# Altium PCB Amber_Main_Board.PcbDoc (part 5 of 6)
Units mm, origin at the board's own origin, x right, y up, seen from the top; angles counter-clockwise.
Board outline 90 x 23 mm, 4 copper layers (Top Layer, Power, Ground, Bottom Layer), stack 1.142 mm thick; 237 components, 104 nets, 614 pads, 347 vias.
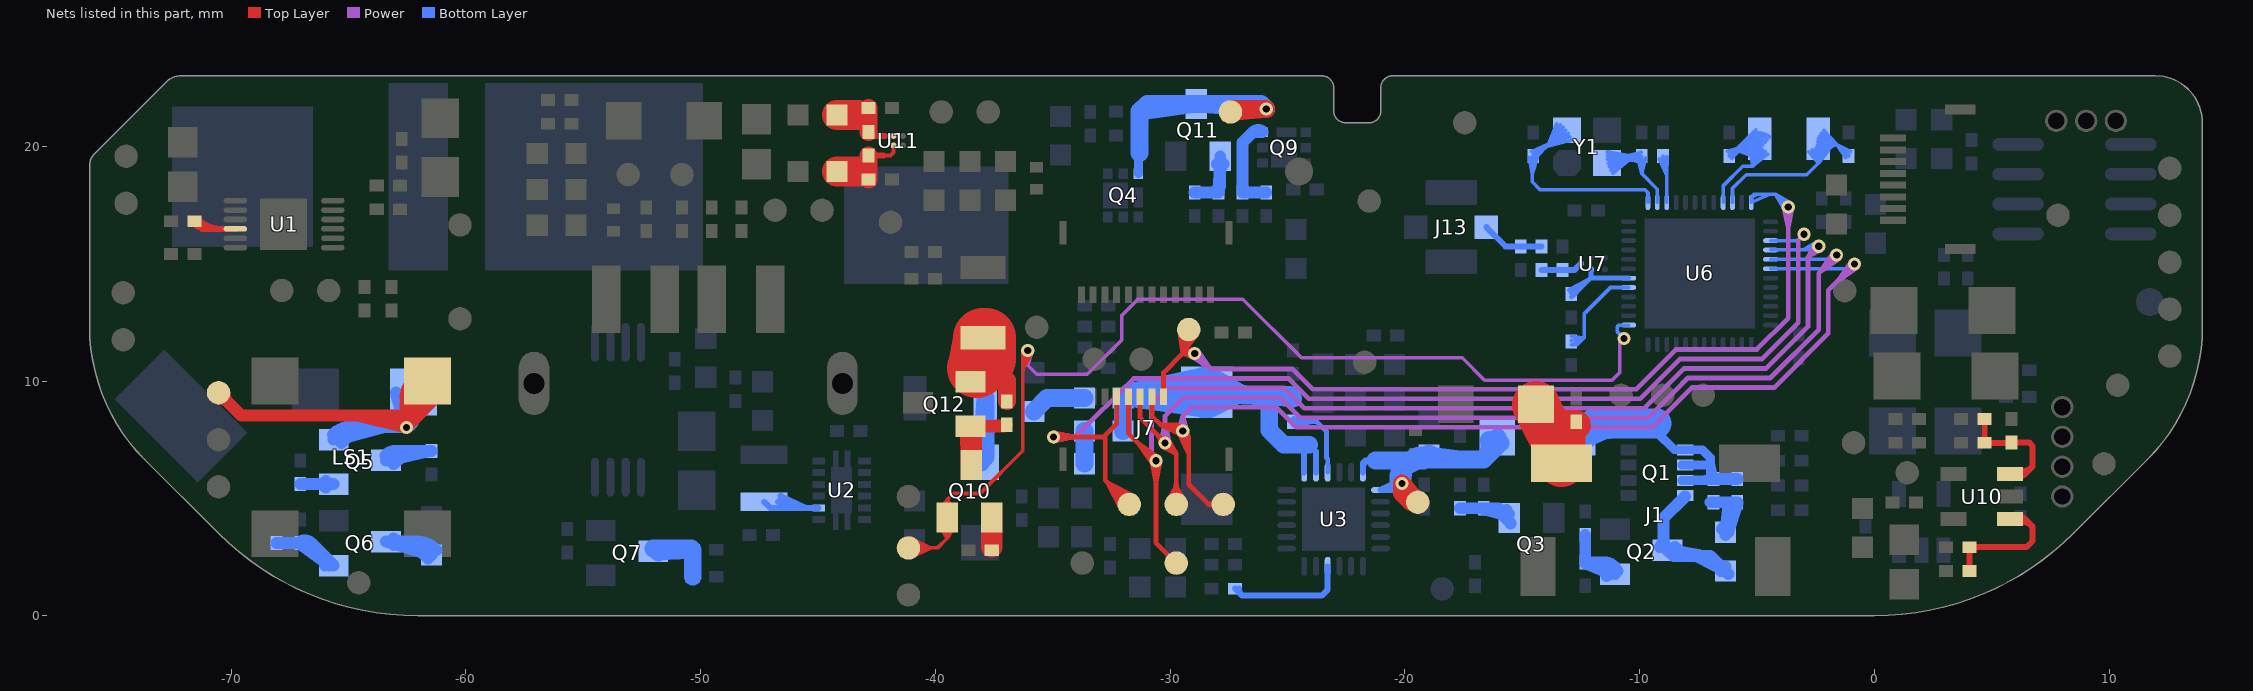
[diagram p7: the nets of this part, all layers, seen from the top]

## Via types
v1: diameter 0.559, hole 0.305, Top Layer to Bottom Layer, tented both sides, 306 vias
v2: diameter 0.66, hole 0.33, Top Layer to Bottom Layer, tented both sides, 16 vias
v3: diameter 0.762, hole 0.508, Top Layer to Bottom Layer, tented both sides, 12 vias
v4: diameter 0.6, hole 0.3, Top Layer to Bottom Layer, tented both sides, 9 vias
v5: diameter 0.5, hole 0.3, Top Layer to Bottom Layer, 3 vias
v6: diameter 0.762, hole 0.559, Top Layer to Bottom Layer, tented both sides, 1 vias

## Nets (pads, with @x,y where several pads share a name; then routed paths per layer and width w, separated by ;. In a path a pad name is that pad's centre, name@x,y a point inside that pad or via, vN(x,y) a via of type N, cw(c..) or ccw(c..) an arc to the next point about the centre after c; other vN are vias at no path point) (continued)
NetC14_1: C14.1 C19.1 L7.2 TP24.1 U3.1 U3.24 | length 48.1
  Top Layer w0.762: -20.03,5.295 v1(-20.12,5.633) ; TP24.1@-19.457,4.958 cw(c-19.486,5.853) -20.12,5.22 ; TP24.1@-19.452,4.958 cw(c-19.445,5.633) v1(-20.12,5.633) ; -20.12,5.22 v1(-20.12,5.633) ; -20.12,5.22 v1(-20.12,5.633) ; -20.12,5.22 v1(-20.12,5.633) ; -20.12,5.22 v1(-20.12,5.633) ; -20.12,5.22 TP24.1@-19.453,4.839 ; -20.12,5.22 TP24.1@-19.453,4.839 ; -20.12,5.22 TP24.1@-19.739,4.839 ; -20.12,5.22 v1(-20.12,5.633) ; v1(-20.12,5.633) TP24.1@-19.739,4.839 ; v1(-20.12,5.633) TP24.1@-19.453,4.839 ; v1(-20.12,5.633) TP24.1@-19.453,4.839 ; v1(-20.12,5.633) TP24.1@-19.453,4.839 ; TP24.1@-19.739,4.839 TP24.1@-19.453,4.839
  Bottom Layer w0.254: U3.24@-21.793,6.384 cw(c-21.514,6.384) -21.711,6.582 ; U3.24@-21.791,6.109 -21.791,6.502 -21.673,6.62 ; -21.756,6.524 -21.791,6.384 -21.673,6.62 ; -21.251,6.62 -21.673,6.62 ; -20.513,5.5 U3.1@-20.766,5.359 ; -20.492,5.359 ccw(c-20.492,5.949) v1@-20.043,5.567 ; v1@-20.236,5.731 cw(c-21.041,6.415) U3.1@-21.041,5.359 ; v1@-20.194,5.766 U3.1@-20.766,5.359 ; v1@-20.191,5.768 U3.1@-20.686,5.421 ; v1@-20.175,5.775 U3.1@-21.041,5.359 ; v1@-20.088,5.484 U3.1@-21.041,5.359 ; v1@-20.085,5.484 U3.1@-20.686,5.421 ; v1@-20.076,5.487 U3.1@-20.766,5.359 ; U3.1@-21.041,5.359 v1(-20.12,5.633) ; U3.1@-21.041,5.359 -20.394,5.359 ; U3.1@-20.766,5.359 -20.394,5.359 ; U3.1@-20.766,5.359 v1(-20.12,5.633) ; U3.1@-20.686,5.421 v1(-20.12,5.633) ; -20.394,5.359 v1(-20.12,5.633)
  Bottom Layer w0.762: -21.251,6.62 -19.768,6.62 ; v1@-20.222,5.633 cw(c-18.934,5.633) -19.844,6.543 ; v1@-20.208,5.581 cw(c-19.72,5.868) -20.12,6.268 ; -20.07,6.317 cw(c-18.977,5.224) C14.1@-18.977,6.77 ; -20.049,6.277 v1(-20.12,5.633) ; -19.75,6.563 C14.1@-18.977,6.839 ; C14.1@-19.003,6.775 ccw(c-19.268,6.119) -19.768,6.62 ; C14.1@-18.928,6.888 ccw(c-18.37,7.446) -18.37,6.657 ; L7.2@-16.426,7.49 cw(c-17.245,7.259) -16.643,6.657 ; L7.2@-15.934,7.366 -16.643,6.657 ; v1(-20.12,5.633) -20.12,6.268 ; v1(-20.12,5.633) -20.12,6.268 ; v1(-20.12,5.633) -20.12,6.268 ; -20.12,6.268 C14.1@-18.977,6.839 ; -20.12,6.268 -19.768,6.62 ; -19.768,6.62 C14.1@-18.977,6.839 ; -19.768,6.62 C14.1@-18.977,6.839 ; -19.768,6.62 C14.1@-18.977,6.839 ; -19.768,6.62 -19.197,6.62 C14.1@-19.16,6.657 ; -19.674,6.62 ccw(c-19.674,7.536) C14.1@-19.026,6.888 ; -19.674,6.62 ccw(c-19.674,7.536) C14.1@-19.026,6.888 ; -19.674,6.62 ccw(c-19.674,7.536) C14.1@-19.026,6.888 ; -19.437,6.651 C14.1@-18.977,6.839 ; -19.437,6.651 C14.1@-18.977,6.839 ; -19.437,6.651 C14.1@-18.977,6.839 ; C14.1@-19.16,6.657 C19.1@-17.653,6.657 ; C14.1@-19.16,6.657 C14.1@-18.977,6.839 ; C14.1@-18.977,6.839 C19.1@-17.653,6.657 ; C19.1@-17.653,6.657 -16.643,6.657 ; -16.643,6.657 -16.061,7.593 -16.643,6.657
NetC17_1: C17.1 L4.1 R75.1 R76.1 U3.19 U3.20 | length 60.1
  Bottom Layer w0.254: U3.19@-24.291,6.109 -24.291,7.069 ; U3.19@-24.291,6.384 -24.291,7.069 ; U3.20@-23.791,6.109 -23.791,6.998 ; U3.20@-23.791,6.384 -23.791,6.998 ; -24.291,7.069 -24.076,7.284 -23.791,6.998
  Bottom Layer w0.762: R76.1@-32.004,7.874 R75.1@-32.004,9.271 ; R75.1@-31.955,9.222 cw(c-31.251,8.518) -31.251,9.514 ; -31.509,9.48 R75.1@-32.004,9.271 ; L4.1@-29.179,9.514 R75.1@-32.004,9.271 ; L4.1@-28.956,9.006 ccw(c-30.184,7.778) -30.184,9.514 ccw(c-30.184,11.25) L4.1@-28.956,10.022 ; L4.1@-28.68,8.834 -29.735,9.573 ; L4.1@-28.68,10.194 -29.735,9.455 ; L4.1@-28.617,8.815 -29.735,9.455 ; L4.1@-28.617,10.213 -29.735,9.573 ; L4.1@-28.572,10.222 R75.1@-31.832,9.286 ; L4.1@-28.526,8.799 R75.1@-31.761,9.514 ; L4.1@-28.526,10.229 R75.1@-31.761,9.514 ; L4.1@-28.476,8.796 R75.1@-31.832,9.286 ; L4.1@-28.334,9.4 -24.902,9.4 C17.1@-24.765,9.263 L4.1@-27.358,9.4 ; L4.1@-28.317,8.807 -27.336,9.354 ; L4.1@-28.291,8.812 -26.987,9.472 ; L4.1@-28.251,10.206 -26.987,9.472 ; L4.1@-28.123,10.155 -27.336,9.354 ; L4.1@-27.94,9.006 cw(c-26.988,8.054) -26.988,9.4 ; L4.1@-27.94,10.022 ccw(c-26.436,11.526) -26.436,9.4 ; -25.781,9.017 -25.781,7.903 -25.162,7.284 -24.076,7.284 ; R75.1@-32.004,9.271 R75.1@-31.761,9.514 ; R75.1@-31.832,9.286 L4.1@-28.448,9.514 ; R75.1@-31.761,9.514 L4.1@-28.448,9.514 ; -29.735,9.455 L4.1@-28.448,9.514 ; -29.735,9.573 L4.1@-28.448,9.514 ; L4.1@-28.448,9.514 -27.336,9.354 ; L4.1@-28.448,9.514 -26.987,9.472
NetC17_2: C17.2 U3.21 | length 7.5
  Bottom Layer w0.203: C17.2@-24.752,8.115 -23.905,8.263 C17.2@-24.752,8.411 ; C17.2@-24.73,8.119 -24.499,8.251 ; C17.2@-24.73,8.407 -24.499,8.275 ; C17.2@-24.717,8.123 -24.499,8.275 ; C17.2@-24.717,8.403 -24.499,8.251 ; C17.2@-24.66,8.158 cw(c-24.407,7.905) -24.407,8.263 cw(c-24.407,8.621) C17.2@-24.66,8.368 ; U3.21@-23.291,6.109 -23.291,6.681 ; U3.21@-23.291,6.384 -23.291,6.681 ; C17.2@-24.765,8.263 -24.499,8.251 ; C17.2@-24.765,8.263 -24.499,8.275 ; C17.2@-24.765,8.263 -23.757,8.263 -23.346,7.852 -23.346,6.736 -23.291,6.681
NetC18_1: C18.1 L8.2 R12.1 | length 14.6
  Bottom Layer w0.508: C18.1@-6.985,4.834 C18.1@-6.858,4.834 ; L8.2@-6.489,3.695 ccw(c-7.13,4.336) -6.223,4.336 ; L8.2@-6.448,3.726 ccw(c-6.754,4.255) -6.163,4.097 ; L8.2@-6.35,3.429 L8.2@-6.223,3.556 ; -6.254,4.101 L8.2@-6.35,3.556 ; L8.2@-6.223,3.874 cw(c-4.932,3.874) R12.1@-5.845,4.787 ; -6.223,4.395 cw(c-5.83,4.395) R12.1@-5.842,4.788 ; -6.05,4.519 L8.2@-6.35,3.556 ; R12.1@-5.969,4.834 C18.1@-6.858,4.834 ; R12.1@-5.842,4.834 C18.1@-6.858,4.834 ; L8.2@-6.35,3.556 R12.1@-5.842,4.784 ; L8.2@-6.35,3.556 -6.223,4.707 ; L8.2@-6.35,3.556 R12.1@-5.842,4.784 ; L8.2@-6.35,3.556 -6.179,4.208 R12.1@-5.842,4.784 ; L8.2@-6.223,3.556 R12.1@-5.842,4.784 ; L8.2@-6.223,3.556 -6.223,4.707 ; -6.223,4.707 R12.1@-5.842,4.784
NetC18_2: C18.2 L7.1 Q1.1 Q1.2 Q1.3 R12.2 | length 21
  Bottom Layer w0.381: -9.271,8.187 -9.271,7.825 -8.517,7.071 Q1.1@-8.066,7.071 -7.325,7.071 ; Q1.3@-8.193,5.771 Q1.3@-8.066,5.771 ; Q1.2@-8.193,6.421 Q1.2@-8.066,6.421 -7.041,6.421 ; Q1.2@-7.951,6.421 -7.041,6.421 ; Q1.1@-7.951,7.071 -7.325,7.071 ; -6.985,6.334 ccw(c-6.408,6.334) C18.2@-6.816,5.926 ; -6.965,6.185 -6.858,5.884 -6.985,6.477 ; Q1.3@-8.066,5.771 C18.2@-6.858,5.834 -7.951,5.771 C18.2@-7.048,5.771 ; Q1.3@-8.066,5.771 C18.2@-7.048,5.771 ; -7.325,7.071 -6.985,6.731 -6.985,6.477 ; C18.2@-7.048,5.771 -6.985,5.834 -6.985,6.477 ; -7.041,6.421 -6.985,6.477
  Bottom Layer w0.508: C18.2@-6.985,5.834 C18.2@-6.858,5.834 ; R12.2@-5.969,5.834 C18.2@-6.858,5.834 ; R12.2@-5.842,5.834 C18.2@-6.858,5.834
  Bottom Layer w1.27: L7.1@-12.641,7.493 -11.947,8.187 -9.271,8.187 ; L7.1@-12.641,7.673 -11.631,8.117 ; L7.1@-12.553,7.584 cw(c-11.099,6.13) -11.099,8.187
NetC29_2: C29.2 U6.37 Y1.3 | length 37.8
  Bottom Layer w0.152: C29.2@-14.706,19.52 -14.583,18.819 ; C29.2@-14.704,19.503 -14.563,19.14 ; C29.2@-14.655,19.406 cw(c-14.829,19.232) -14.583,19.232 ; C29.2@-14.619,19.779 -13.908,20.087 ; C29.2@-14.605,19.787 -14.123,19.912 ; -14.583,18.987 cw(c-13.99,18.987) C29.2@-14.409,19.406 ; C29.2@-14.532,19.579 -14.583,19.528 -14.583,18.482 -14.256,18.155 -9.782,18.155 -9.647,18.02 ; C29.2@-14.532,19.65 ccw(c-14.532,20.1) -14.214,19.782 ; C29.2@-14.532,19.803 ccw(c-14.532,20.62) -13.954,20.042 ; C29.2@-14.435,19.561 Y1.3@-13.362,20.634 ; C29.2@-14.414,19.501 -13.908,20.087 ; C29.2@-14.41,19.505 -14.123,19.912 ; C29.2@-14.366,19.477 -14.563,19.14 ; C29.2@-14.362,19.495 -14.583,18.819 ; -14.238,19.758 cw(c-13.146,18.665) Y1.3@-13.146,20.21 ; -13.978,20.018 cw(c-13.146,19.186) Y1.3@-13.146,20.362 ; -13.838,20.158 ccw(c-14.363,20.684) Y1.3@-13.62,20.684 ; -13.718,20.278 cw(c-13.146,19.706) Y1.3@-13.146,20.515 ; Y1.3@-13.545,20.939 -13.734,20.205 ; Y1.3@-13.533,20.958 -13.918,20.003 ; Y1.3@-13.526,20.967 -13.719,20.312 ; Y1.3@-13.397,20.884 -13.734,20.205 ; Y1.3@-13.394,20.889 -13.918,20.003 ; Y1.3@-13.379,20.905 -13.719,20.312 ; Y1.3@-13.268,20.801 -13.918,20.003 ; Y1.3@-13.267,20.802 -13.734,20.205 ; Y1.3@-13.255,20.813 -13.719,20.312 ; Y1.3@-13.072,20.532 -13.719,20.312 ; Y1.3@-13.055,20.542 -13.734,20.205 ; Y1.3@-13.045,20.548 -13.918,20.003 ; Y1.3@-13.042,20.221 -13.719,20.312 ; Y1.3@-13.04,20.38 -13.719,20.312 ; Y1.3@-13.001,20.397 -13.734,20.205 ; Y1.3@-12.977,20.241 -13.734,20.205 ; Y1.3@-12.974,20.412 -13.918,20.003 ; Y1.3@-12.923,20.266 -13.918,20.003 ; U6.37@-9.647,17.608 -9.647,18.02 ; U6.37@-9.647,17.833 -9.647,18.02 ; -14.583,18.819 -14.532,19.529 -14.563,19.14 ; -14.123,19.912 -14.532,19.629 -13.908,20.087 ; -13.918,20.003 Y1.3@-13.146,20.684 ; -13.734,20.205 Y1.3@-13.146,20.684 ; -13.719,20.312 Y1.3@-13.146,20.684
NetC31_2: C31.2 U6.38 Y1.1 | length 37.4
  Bottom Layer w0.152: Y1.1@-11.385,19.603 -10.261,19.579 ; Y1.1@-11.378,19.45 -10.261,19.579 ; Y1.1@-11.371,19.757 -10.261,19.579 ; Y1.1@-11.37,19.451 -10.668,19.468 ; Y1.1@-11.361,19.452 -10.468,19.449 ; Y1.1@-11.357,19.605 -10.668,19.468 ; Y1.1@-11.348,19.605 -10.468,19.449 ; Y1.1@-11.332,19.275 cw(c-10.765,18.898) -10.765,19.579 ; Y1.1@-11.309,19.756 -10.668,19.468 ; Y1.1@-11.307,19.756 -10.468,19.449 ; Y1.1@-11.299,19.121 -10.468,19.449 ; Y1.1@-11.299,19.234 -10.954,19.579 C31.2@-9.913,19.579 ; Y1.1@-11.29,19.124 -10.261,19.579 ; Y1.1@-11.282,19.127 -10.668,19.468 ; Y1.1@-11.231,18.984 -10.468,19.449 ; Y1.1@-11.218,18.989 -10.261,19.579 ; Y1.1@-11.205,19.19 cw(c-10.481,18.71) -10.481,19.579 ; Y1.1@-11.193,19.001 -10.668,19.468 ; Y1.1@-11.138,18.858 -10.468,19.449 ; Y1.1@-11.128,18.863 -10.261,19.579 ; Y1.1@-11.078,19.106 cw(c-10.197,18.521) -10.197,19.579 ; Y1.1@-11.075,18.895 -10.668,19.468 ; Y1.1@-10.951,19.022 cw(c-9.913,18.333) C31.2@-9.913,19.579 ; C31.2@-10.085,19.507 -9.913,18.841 ; C31.2@-10.082,19.488 -9.927,19.218 ; C31.2@-10.078,19.473 -9.899,19.218 ; C31.2@-10.036,19.406 cw(c-10.333,19.109) -9.913,19.109 cw(c-9.493,19.109) C31.2@-9.79,19.406 ; C31.2@-10.036,19.456 ccw(c-10.333,19.159) -10.333,19.579 ccw(c-10.333,19.998) C31.2@-10.036,19.702 ; C31.2@-9.969,19.414 -10.224,19.593 ; C31.2@-9.969,19.743 -10.224,19.564 ; C31.2@-9.968,19.694 -10.536,19.412 ; C31.2@-9.954,19.41 -10.224,19.564 ; C31.2@-9.954,19.748 -10.224,19.593 ; C31.2@-9.934,19.406 -10.62,19.579 C31.2@-9.934,19.751 ; C31.2@-9.905,19.355 -10.536,19.412 ; C31.2@-9.749,19.473 -9.927,19.218 ; C31.2@-9.744,19.488 -9.899,19.218 ; C31.2@-9.741,19.507 -9.913,18.841 ; U6.38@-9.247,17.608 -9.247,18.175 ; U6.38@-9.247,17.833 -9.247,18.175 ; Y1.1@-11.346,19.284 -10.261,19.579 ; Y1.1@-11.346,19.284 -10.468,19.449 ; Y1.1@-11.346,19.284 -10.668,19.468 ; -10.536,19.412 C31.2@-9.913,19.529 ; -10.224,19.564 C31.2@-9.913,19.579 ; -10.224,19.593 C31.2@-9.913,19.579 ; -9.927,19.218 C31.2@-9.913,19.529 ; -9.913,18.841 C31.2@-9.913,19.529 ; -9.913,18.841 -9.247,18.175 ; -9.913,18.841 C31.2@-9.913,19.579 ; C31.2@-9.913,19.529 -9.899,19.218
NetC32_2: C32.2 U6.45 Y2.2 | length 49.1
  Bottom Layer w0.152: U6.45@-6.447,17.608 -6.447,18.31 ; U6.45@-6.447,17.833 -6.447,18.31 ; C32.2@-6.263,19.781 -5.91,19.875 ; C32.2@-6.256,19.785 -5.635,19.989 ; C32.2@-6.239,19.792 -5.745,19.878 ; C32.2@-6.207,19.8 -5.854,19.767 ; C32.2@-6.18,19.803 ccw(c-6.18,20.343) -5.798,19.961 ; C32.2@-6.075,19.49 -5.854,19.767 ; C32.2@-6.069,19.495 -5.745,19.878 ; C32.2@-6.067,19.692 cw(c-5.558,19.183) Y2.2@-5.073,19.714 ; C32.2@-6.066,19.498 -5.635,19.989 ; C32.2@-6.036,19.532 -5.91,19.875 ; C32.2@-6.006,19.629 cw(c-5.707,19.629) -5.919,19.84 ; C32.2@-5.954,19.804 cw(c-5.451,19.301) Y2.2@-4.97,19.827 ; -5.842,19.917 cw(c-5.343,19.418) Y2.2@-4.868,19.939 ; -5.729,20.03 cw(c-5.235,19.536) Y2.2@-4.765,20.052 ; -5.616,20.143 cw(c-5.128,19.654) Y2.2@-4.662,20.165 ; -5.503,20.256 cw(c-5.02,19.772) Y2.2@-4.559,20.277 ; -5.39,20.368 cw(c-4.912,19.89) Y2.2@-4.457,20.39 ; Y2.2@-5.312,19.959 -5.184,19.146 ; Y2.2@-5.299,20.204 ccw(c-5.444,20.165) -5.444,20.315 ; Y2.2@-5.299,20.426 cw(c-5.444,20.465) -5.444,20.315 ; Y2.2@-5.176,19.602 ccw(c-5.666,19.065) C32.2@-6.18,19.579 -5.444,20.315 ; Y2.2@-5.156,19.969 -5.184,19.146 ; Y2.2@-5.116,20.273 -5.51,19.775 ; Y2.2@-5.086,20.29 -5.404,19.886 ; Y2.2@-5.042,19.519 -5.404,19.886 ; Y2.2@-5.007,20.322 -5.918,19.841 ; Y2.2@-5.005,20.161 -5.51,19.775 ; Y2.2@-5.004,19.949 -5.184,19.146 ; Y2.2@-4.976,20.172 -5.404,19.886 ; Y2.2@-4.947,19.495 -5.918,19.841 ; Y2.2@-4.947,19.649 -5.404,19.886 ; Y2.2@-4.945,20.18 -5.918,19.841 ; Y2.2@-4.94,19.494 -5.51,19.775 ; Y2.2@-4.927,20.028 -5.51,19.775 ; Y2.2@-4.91,20.032 -5.404,19.886 ; Y2.2@-4.906,19.644 -5.918,19.841 ; Y2.2@-4.905,20.033 -5.918,19.841 ; Y2.2@-4.897,19.796 -5.404,19.886 ; Y2.2@-4.888,19.643 -5.51,19.775 ; Y2.2@-4.888,19.796 -5.918,19.841 ; Y2.2@-4.875,19.797 -5.51,19.775 ; Y2.2@-4.782,19.864 -5.184,19.146 ; Y2.2@-4.656,19.777 -5.184,19.146 ; Y2.2@-4.547,19.666 -5.184,19.146 ; -6.447,18.31 -5.61,19.146 -5.184,19.146 ; C32.2@-6.18,19.629 -5.91,19.875 ; C32.2@-6.18,19.629 -5.854,19.767 ; C32.2@-6.18,19.629 -5.635,19.989 ; C32.2@-6.18,19.629 -5.745,19.878 ; -5.918,19.841 Y2.2@-4.89,19.915 ; -5.51,19.775 Y2.2@-4.89,19.915 ; -5.444,20.315 -5.052,20.706 -5.444,20.315 ; -5.444,20.315 -4.957,20.578 -5.444,20.315 ; -5.444,20.315 -4.903,20.433 -5.444,20.315 ; -5.444,20.315 Y2.2@-4.89,20.315 ; -5.444,20.315 -5.052,19.923 -5.444,20.315 ; -5.444,20.315 -4.957,20.052 -5.444,20.315 ; -5.444,20.315 -4.903,20.196 -5.444,20.315 ; -5.444,20.315 Y2.2@-4.89,20.315 ; -5.404,19.886 Y2.2@-4.89,19.915 ; -5.184,19.146 Y2.2@-4.89,19.915 ; -5.184,19.146 -4.89,19.441 Y2.2@-4.89,20.315
NetC34_2: C34.2 U6.46 Y2.1 | length 31.4
  Bottom Layer w0.152: U6.46@-6.047,17.608 -6.047,18.207 ; U6.46@-6.047,17.833 -6.047,18.207 ; Y2.1@-2.79,19.774 -2.39,19.279 ; Y2.1@-2.655,19.857 -2.39,19.279 ; Y2.1@-2.553,19.524 cw(c-2.655,19.279) -2.39,19.279 ; Y2.1@-2.509,19.904 -2.39,19.279 ; Y2.1@-2.429,20.046 -1.582,20.061 ; Y2.1@-2.418,20.199 -1.582,20.061 ; Y2.1@-2.413,20.032 -1.855,20.079 ; Y2.1@-2.412,19.891 -1.582,20.061 ; Y2.1@-2.404,20.186 -1.855,20.079 ; Y2.1@-2.386,20.034 -1.863,19.957 ; Y2.1@-2.367,19.798 -1.863,19.957 ; Y2.1@-2.351,20.337 -1.855,20.079 ; Y2.1@-2.346,20.425 -1.582,20.061 ; Y2.1@-2.343,19.805 -1.855,20.079 ; Y2.1@-2.342,20.182 -1.863,19.957 ; Y2.1@-2.299,19.659 -1.863,19.957 ; Y2.1@-2.272,19.904 -2.39,19.279 ; Y2.1@-2.268,20.557 -1.582,20.061 ; Y2.1@-2.252,20.315 -1.863,19.957 ; Y2.1@-2.25,19.682 -1.855,20.079 ; Y2.1@-2.227,19.524 ccw(c-2.125,19.279) -2.39,19.279 ; Y2.1@-2.189,19.541 -1.863,19.957 ; Y2.1@-2.166,20.674 -1.582,20.061 ; Y2.1@-2.134,19.824 cw(c-1.798,19.704) -1.798,20.061 ; Y2.1@-2.125,19.857 -2.39,19.279 ; Y2.1@-2.122,19.587 -1.855,20.079 ; Y2.1@-2.09,20.214 ccw(c-1.719,20.585) -1.719,20.061 ; Y2.1@-1.991,19.772 cw(c-1.582,19.627) -1.582,20.061 ; Y2.1@-1.99,19.774 -2.39,19.279 ; -1.482,19.961 ccw(c-1.1,20.343) C34.2@-1.1,19.803 ; -1.361,19.84 cw(c-1.573,19.629) C34.2@-1.274,19.629 ; C34.2@-1.244,19.532 -1.37,19.875 ; C34.2@-1.232,19.516 -1.582,20.061 ; C34.2@-1.1,19.579 -1.582,20.061 ; C34.2@-1.017,19.781 -1.37,19.875 ; C34.2@-1.002,19.773 -1.582,20.061 ; -6.047,18.207 -5.463,18.791 -2.878,18.791 -2.39,19.279 ; -2.39,19.279 Y2.1@-2.39,19.915 ; -2.39,19.279 Y2.1@-2.39,20.315 ; Y2.1@-2.39,19.915 -1.863,19.957 ; Y2.1@-2.39,19.915 -1.855,20.079 ; Y2.1@-2.39,20.315 -1.582,20.061 ; Y2.1@-2.39,20.315 -2.136,20.061 -1.582,20.061 ; -1.582,20.061 -1.1,19.629 -1.37,19.875
NetC35_2: C35.2 U6.39 | length 8.8
  Bottom Layer w0.152: C35.2@-9.171,19.474 -8.847,18.767 ; C35.2@-9.168,19.465 -8.88,18.974 ; C35.2@-9.135,19.412 -8.867,19.247 ; C35.2@-9.129,19.406 cw(c-9.81,18.725) -8.847,18.725 ; C35.2@-9.021,19.514 cw(c-9.442,19.093) -8.847,19.093 ; C35.2@-9.006,19.579 -8.847,19.42 U6.39@-8.847,17.608 ; U6.39@-8.847,17.833 -8.847,18.39 ; C35.2@-8.835,19.559 -8.867,19.247 ; C35.2@-8.833,19.541 -8.88,18.974 ; C35.2@-8.833,19.545 -8.847,18.767 ; C35.2@-9.006,19.529 -8.867,19.247 ; C35.2@-9.006,19.529 -8.847,18.767 ; C35.2@-9.006,19.529 -8.88,18.974
NetC39_1: C39.1 R41.2 U7.5 | length 1.8
  Bottom Layer w0.254: R41.2@-14.181,14.735 C39.1@-13.292,14.735 -12.773,14.735 U7.5@-12.509,14.999
NetC40_1: C40.1 J13.1 R41.1 | length 2.7
  Bottom Layer w0.254: J13.1@-16.534,16.555 -15.714,15.735 C40.1@-15.07,15.735 R41.1@-14.181,15.735
NetC41_2: C41.2 U6.30 U7.3 | length 8.2
  Bottom Layer w0.203: C41.2@-12.991,13.878 -12.183,14.304 ; C41.2@-12.971,13.889 -12.518,14.006 ; C41.2@-12.911,13.576 -12.104,14.383 U6.30@-10.472,14.383 ; C41.2@-12.911,13.901 ccw(c-12.911,14.687) -12.356,14.131 ; -12.518,14.006 -12.812,13.642 -12.183,14.304 ; -12.518,14.006 -12.911,13.753 -12.183,14.304 ; -12.076,14.411 U7.3@-12.076,14.749 -12.076,14.411
NetC42_2: C42.2 U6.29 | length 6.2
  Bottom Layer w0.152: C42.2@-12.919,11.9 -12.37,11.839 ; C42.2@-12.911,11.544 -12.665,11.544 -12.37,11.839 ; C42.2@-12.911,11.726 -12.37,11.839 ; C42.2@-12.849,11.564 -12.37,11.839 ; U6.29@-10.697,13.983 -11.242,13.983 ; U6.29@-10.472,13.983 -11.242,13.983 ; -12.37,11.839 -12.37,12.855 -11.242,13.983
NetC48_2: C48.2 C49.1 R49.2 U11.A2 | length 7.7
  Top Layer w0.178: -42.164,20.447 -42.155,20.438 U11.A2@-41.783,20.438
  Top Layer w0.254: C49.1@-42.853,20.611 -42.68,20.438 -42.155,20.438 -42.853,20.561 -42.445,20.462 ; C49.1@-42.766,20.648 ccw(c-42.259,21.155) -42.259,20.438
  Top Layer w0.762: C49.1@-42.853,20.611 C48.2@-42.845,21.635 -42.853,20.661 -42.853,21.627 C49.1@-42.853,20.611
  Top Layer w1.27: R49.2@-44.196,21.336 -43.274,21.336
NetC49_2: C49.2 C55.1 R50.2 U11.A1 | length 7
  Top Layer w0.178: -42.21,19.611 -41.907,19.611 -41.783,19.735 U11.A1@-41.783,20.038
  Top Layer w0.254: C49.2@-42.853,19.611 -42.21,19.611 ; C49.2@-42.766,19.524 cw(c-42.556,19.314) -42.556,19.611 cw(c-42.556,19.908) C49.2@-42.766,19.698
  Top Layer w0.762: C55.1@-42.853,18.595 -42.853,19.561 C55.1@-42.845,18.587 C49.2@-42.853,19.611 C55.1@-42.853,18.595
  Top Layer w1.27: R50.2@-44.196,18.923 -43.11,18.923
NetC51_2: C51.2 R54.2 U10.1 | length 15.3
  Top Layer w0.254: R54.2@3.969,1.992 ccw(c3.759,2.202) 4.056,2.202 ccw(c4.353,2.202) R54.2@4.143,1.992 ; C51.2@3.969,2.834 cw(c3.759,2.624) 4.056,2.624 cw(c4.353,2.624) C51.2@4.143,2.834 ; R54.2@4.056,1.909 C51.2@4.056,2.921 ; C51.2@4.056,2.917 R54.2@4.056,1.905 C51.2@4.056,2.921 ; C51.2@4.106,2.921 5.118,2.921 ; C51.2@4.193,2.834 cw(c4.403,2.624) 4.403,2.921 cw(c4.403,3.218) C51.2@4.193,3.008 ; U10.1@5.772,4.13 6.411,4.13 ; U10.1@5.996,3.959 6.408,3.985 ; U10.1@5.997,4.207 cw(c6.133,3.795) 6.439,4.102 ; U10.1@6.076,3.966 cw(c6.277,3.356) 6.731,3.81 ; U10.1@6.116,4.275 6.408,3.985 ; U10.1@6.15,4.014 cw(c6.411,3.779) 6.411,4.13 ; U10.1@6.15,4.246 ccw(c6.411,4.481) 6.411,4.13 ; C51.2@4.056,2.921 6.477,2.921 6.731,3.175 6.731,3.81 ; U10.1@6.022,4.13 6.411,4.13 ; U10.1@6.022,4.13 6.411,4.13 ; U10.1@6.022,4.13 6.408,3.985 ; 6.411,4.13 6.06,4.299 6.411,4.13 ; 6.411,4.13 6.06,3.961 6.411,4.13 ; 6.411,4.13 6.731,3.81
NetC52_1: C52.1 R13.1 R55.1 U10.3 | length 16.8
  Top Layer w0.254: R13.1@4.604,7.453 ccw(c4.394,7.663) 4.691,7.663 ccw(c4.988,7.663) R13.1@4.778,7.453 ; C52.1@4.604,8.295 cw(c4.394,8.085) 4.691,8.085 cw(c4.988,8.085) C52.1@4.778,8.295 ; R13.1@4.691,7.37 C52.1@4.691,8.382 R13.1@4.691,7.366 5.834,7.366 R55.1@5.842,7.374 ; R13.1@4.741,7.366 R55.1@5.753,7.366 ; R13.1@4.828,7.279 cw(c5.038,7.069) 5.038,7.366 cw(c5.038,7.663) R13.1@4.828,7.453 ; 5.526,7.366 ccw(c5.526,7.69) R55.1@5.755,7.461 ; 5.564,7.366 cw(c5.564,7.096) R55.1@5.755,7.287 ; U10.3@5.772,6.03 6.411,6.03 ; R55.1@5.929,7.287 cw(c6.139,7.077) 6.139,7.374 cw(c6.139,7.671) R55.1@5.929,7.461 ; U10.3@5.996,6.201 6.408,6.175 ; U10.3@5.997,5.953 ccw(c6.133,6.365) 6.439,6.058 ; U10.3@6.076,6.194 ccw(c6.277,6.804) 6.731,6.35 ; U10.3@6.116,5.885 6.408,6.175 ; U10.3@6.15,5.914 cw(c6.411,5.679) 6.411,6.03 ; U10.3@6.15,6.146 ccw(c6.411,6.381) 6.411,6.03 ; R55.1@5.842,7.374 4.83,7.366 R55.1@5.842,7.374 ; R55.1@5.842,7.374 6.596,7.374 6.731,7.239 6.731,6.35 ; U10.3@6.022,6.03 6.408,6.175 ; U10.3@6.022,6.03 6.411,6.03 ; U10.3@6.022,6.03 6.411,6.03 ; 6.411,6.03 6.06,6.199 6.411,6.03 ; 6.411,6.03 6.06,5.861 6.411,6.03 ; 6.411,6.03 6.731,6.35
NetC56_1: C56.1 Q4.3 Q11.3 R56.1 TP41.1 | length 19.2
  Top Layer w0.762: TP41.1@-27.432,21.463 v1(-25.908,21.59) TP41.1@-27.305,21.59 ; TP41.1@-27.348,21.379 cw(c-26.838,20.869) -26.838,21.59
  Bottom Layer w0.381: Q4.3@-31.354,18.83 -31.354,19.67 Q4.3@-31.354,18.857
  Bottom Layer w0.762: Q11.3@-28.616,21.806 v1(-25.908,21.59) -26.124,21.806 Q11.3@-28.883,21.806 ; C56.1@-31.304,20.46 -31.304,19.72 C56.1@-31.304,20.46 ; C56.1@-31.304,20.46 R56.1@-31.304,21.476 -30.974,21.806 ; R56.1@-31.254,21.476 Q11.3@-28.883,21.806 ; R56.1@-31.254,21.476 -30.974,21.806 ; R56.1@-31.254,21.476 -30.974,21.806 ; -30.974,21.806 Q11.3@-28.883,21.806
NetC67_1: C67.1 J1.1 L5.1 | length 8.9
  Top Layer w1.27: L5.1@-14.419,9.017 -14.419,8.828 -13.716,8.125 ; C67.1@-12.7,8.125 -13.716,8.125 ; -13.716,8.125 -14.419,8.977 -13.716,8.125
  Top Layer w2.032: L5.1@-14.419,8.977 -13.33,6.858 -13.33,7.739 J1.1@-13.33,6.503
NetC68_1: C68.1 R75.2 | length 4.8
  Bottom Layer w0.762: -35.242,9.271 C68.1@-35.814,8.7 -35.242,9.271 ; -35.242,9.271 R75.2@-33.655,9.271 -35.242,9.271
NetC69_2: C69.2 R76.2 | length 1.4
  Bottom Layer w0.762: C69.2@-33.655,6.477 R76.2@-33.655,7.874
NetD12_1: D12.1 LS1.1 Q5.1 TP46.1 | length 89.1
  Top Layer w0.508: TP46.1@-70.539,9.254 cw(c-70.539,8.66) -70.119,9.08 cw(c-69.699,9.5) TP46.1@-70.293,9.5 ; TP46.1@-70.539,9.5 -69.561,8.522 -62.569,8.522 ; -64.624,8.522 v1(-62.538,8.014) ; -63.826,8.522 cw(c-63.826,6.726) v1@-62.556,7.996 ; -63.361,8.461 v1(-62.538,8.014) ; -62.569,8.778 cw(c-61.591,8.778) LS1.1@-61.627,9.756 ; LS1.1@-62.569,9.306 cw(c-61.61,9.306) LS1.1@-61.646,10.264 ; LS1.1@-62.369,10.009 v1(-62.538,8.014) ; LS1.1@-62.337,10.249 -62.569,8.522 ; LS1.1@-61.736,9.836 v1(-62.538,8.014) ; -62.569,8.522 -61.106,9.469 v1(-62.538,8.014) ; -62.569,8.522 LS1.1@-61.636,9.994 LS1.1@-62.569,9.061 ; -62.569,8.522 v1(-62.538,8.014) ; -62.569,8.522 v1(-62.538,8.014) ; -62.569,8.522 v1(-62.538,8.014) ; -62.569,8.522 v1(-62.538,8.014) ; -62.569,8.522 v1(-62.538,8.014) ; -62.569,8.522 v1(-62.538,8.014) ; -62.569,8.522 -62.569,8.045 v1(-62.538,8.014) ; -62.569,8.522 LS1.1@-62.569,9.061 ; LS1.1@-62.569,9.061 v1(-62.538,8.014)
  Bottom Layer w0.508: Q5.1@-65.671,7.721 cw(c-64.837,6.887) -64.837,8.067 ; Q5.1@-65.633,7.506 -65.072,8.067 ; Q5.1@-65.312,7.362 cw(c-63.611,5.661) -63.611,8.067 ; Q5.1@-65.254,7.532 cw(c-64.621,7.615) -65.072,8.067 ; -65.142,8.027 Q5.1@-65.456,7.506 ; -64.346,8.067 v1(-62.538,8.014) ; -64.233,7.985 Q5.1@-65.456,7.506 ; -63.334,8.067 Q5.1@-65.456,7.506 ; v1@-62.556,8.032 ccw(c-63.341,8.816) D12.1@-62.231,8.816 ; v1@-62.541,8.039 ccw(c-62.59,8.395) -62.231,8.395 ; D12.1@-62.531,8.855 cw(c-62.734,8.395) -62.231,8.395 ; -62.269,8.529 v1(-62.538,8.014) ; D12.1@-61.931,8.855 ccw(c-61.728,8.395) -62.231,8.395 ; Q5.1@-65.456,7.506 -65.072,8.067 ; Q5.1@-65.456,7.506 -65.072,8.067 ; -65.072,8.067 v1@-62.559,8.067 ; D12.1@-62.936,9.294 v1(-62.538,8.014) ; D12.1@-62.936,9.294 v1(-62.538,8.014) ; D12.1@-62.936,9.294 -62.231,8.395 ; D12.1@-62.936,9.294 -62.231,8.395 ; v1@-62.559,8.067 -62.977,9.515 v1(-62.538,8.014) ; v1@-62.559,8.067 -61.566,9.2 v1(-62.538,8.014) ; v1@-62.559,8.067 D12.1@-62.231,9.538 ; v1@-62.559,8.067 -62.231,8.395 ; v1(-62.538,8.014) -62.965,9.405 -62.38,8.261 ; v1(-62.538,8.014) D12.1@-62.231,9.538 ; v1(-62.538,8.014) -62.231,8.395 ; v1(-62.538,8.014) D12.1@-61.526,9.294 ; v1(-62.538,8.014) -62.231,8.395 ; v1(-62.538,8.014) D12.1@-61.526,9.294 ; v1(-62.538,8.014) -62.231,8.395 ; v1(-62.538,8.014) D12.1@-62.231,9.538 ; v1(-62.538,8.014) -62.231,8.395 ; v1(-62.538,8.014) -61.547,9.24 -62.38,8.261 ; v1(-62.538,8.014) D12.1@-62.231,9.538 ; v1(-62.538,8.014) -62.231,8.395 ; v1(-62.538,8.014) D12.1@-62.231,9.538 ; v1(-62.538,8.014) -62.231,8.395 ; v1(-62.538,8.014) -62.231,8.395 ; -62.38,8.261 D12.1@-62.231,9.538 ; -62.231,8.395 D12.1@-61.526,9.294 ; -62.231,8.395 D12.1@-61.526,9.294 ; -62.231,8.395 D12.1@-62.231,9.538 ; -62.231,8.395 D12.1@-62.231,9.538
NetF1_2: F1.2 L9.2 | length 12.1
  Bottom Layer w0.762: L9.2@-38.328,6.804 ccw(c-39.434,7.91) -37.87,7.91 ; L9.2@-38.1,6.536 L9.2@-37.87,6.766 ; -37.923,7.505 L9.2@-38.06,6.536 ; L9.2@-38.06,6.536 F1.2@-37.87,9.271 L9.2@-37.87,6.766 ; L9.2@-38.06,6.536 -37.87,8.821 L9.2@-37.87,6.766
NetF2_1: F2.1 Q12.2 R74.1 | length 10.1
  Top Layer w0.762: R74.1@-36.957,9.136 -36.957,10.033 ; R74.1@-36.957,9.186 -36.957,10.033 ; -36.957,10.033 -38.329,9.97 -37.846,10.922 -36.957,10.033
  Top Layer w2.54: F2.1@-37.846,11.835 -37.846,10.922 ; F2.1@-37.973,11.835 -37.846,10.922 ; F2.1@-37.973,11.835 -37.846,10.922 ; F2.1@-37.973,11.835 -38.227,10.541 -37.846,10.922
NetJ7_4: J7.4 TP6.1 U6.3 | length 72.4
  Top Layer w0.203: v1@-34.949,7.443 -34.078,7.62 v1@-34.949,7.797 ; v1@-34.925,7.447 -34.649,7.605 ; v1@-34.925,7.793 -34.649,7.635 ; v1@-34.91,7.452 -34.649,7.635 ; v1@-34.91,7.788 -34.649,7.605 ; v1@-34.841,7.494 cw(c-34.538,7.191) -34.538,7.62 cw(c-34.538,8.049) v1@-34.841,7.746 ; -32.28,8.365 J7.4@-32.28,9.125 ; J7.4@-32.28,9.525 J7.4@-32.28,9.325 -32.28,8.17 -32.766,7.684 ; TP6.1@-32.138,4.744 ccw(c-33.1,4.744) -32.42,5.424 ccw(c-31.74,6.104) TP6.1@-31.74,5.142 ; TP6.1@-32.098,4.568 -32.221,5.271 ; TP6.1@-32.08,4.536 -32.267,5.225 ; TP6.1@-32.061,4.508 -32.671,5.675 ; TP6.1@-31.901,4.633 -32.221,5.271 ; TP6.1@-31.89,4.619 -32.267,5.225 ; TP6.1@-31.888,4.616 -32.671,5.675 ; TP6.1@-31.629,4.905 -32.267,5.225 ; TP6.1@-31.615,4.894 -32.221,5.271 ; TP6.1@-31.613,4.892 -32.671,5.675 ; TP6.1@-31.564,5.101 -32.267,5.225 ; TP6.1@-31.532,5.084 -32.221,5.271 ; TP6.1@-31.504,5.065 -32.671,5.675 ; v1(-34.967,7.62) -34.649,7.605 ; v1(-34.967,7.62) -34.649,7.635 ; v1(-34.967,7.62) -32.83,7.62 -32.766,7.684 ; -32.766,7.684 -32.766,5.77 TP6.1@-31.74,4.744 ; -32.671,5.675 TP6.1@-31.74,4.744 ; -32.267,5.225 TP6.1@-31.74,4.744 ; -32.221,5.271 TP6.1@-31.74,4.744
  Power w0.203: v1@-34.949,7.443 -34.078,7.62 v1@-34.949,7.797 ; v1@-34.925,7.447 -34.649,7.605 ; v1@-34.925,7.793 -34.649,7.635 ; v1@-34.91,7.452 -34.649,7.635 ; v1@-34.91,7.788 -34.649,7.605 ; v1@-34.841,7.494 cw(c-34.538,7.191) -34.538,7.62 cw(c-34.538,8.049) v1@-34.841,7.746 ; -3.241,16.015 -3.241,12.479 -4.778,10.941 -8.279,10.941 -9.296,9.924 -9.296,9.921 -9.972,9.246 -24.089,9.246 -24.946,10.103 -31.559,10.103 -34.043,7.62 v1(-34.967,7.62) ; v1(-34.967,7.62) -34.649,7.605 ; v1(-34.967,7.62) -34.649,7.635
  Bottom Layer w0.152: U6.3@-4.422,15.983 -3.273,15.983 v1(-3.005,16.251) ; U6.3@-4.197,15.983 -3.64,15.983
NetJ7_5: J7.5 TP7.1 U6.4 | length 63.6
  Top Layer w0.203: -31.78,8.365 J7.5@-31.78,9.125 ; J7.5@-31.78,9.525 J7.5@-31.78,9.325 -31.78,7.777 v1(-30.607,6.604) ; v1@-30.785,6.604 ccw(c-31.214,6.604) -30.911,6.908 ccw(c-30.607,7.211) v1@-30.607,6.782 ; v1@-30.784,6.586 -30.607,5.715 ; v1@-30.78,6.562 -30.622,6.286 ; v1@-30.775,6.547 -30.592,6.286 ; v1@-30.743,6.49 -31.317,7.314 ; v1@-30.733,6.478 cw(c-31.036,6.175) -30.607,6.175 cw(c-30.178,6.175) v1@-30.481,6.478 ; v1@-30.493,6.74 -31.317,7.314 ; v1@-30.439,6.547 -30.622,6.286 ; v1@-30.434,6.562 -30.592,6.286 ; v1@-30.43,6.586 -30.607,5.715 ; TP7.1@-29.74,2.244 -30.607,3.111 v1(-30.607,6.604) ; -31.317,7.314 v1(-30.607,6.604) ; -30.622,6.286 v1(-30.607,6.604) ; -30.607,5.715 v1(-30.607,6.604) ; v1(-30.607,6.604) -30.592,6.286
  Power w0.203: v1(-30.607,6.604) -30.801,6.798 -30.801,8.995 -30.099,9.697 -25.143,9.697 -24.285,8.839 -9.804,8.839 -8.89,9.753 -8.89,9.756 -8.111,10.535 -4.61,10.535 -2.835,12.31 -2.835,15.278 ; v1@-2.548,15.743 cw(c-2.977,15.743) -2.674,15.439 cw(c-2.37,15.136) v1@-2.37,15.565 ; v1@-2.512,15.85 -2.835,15.278 ; v1@-2.262,15.601 -2.835,15.278 ; -2.835,15.278 v1(-2.37,15.743) -2.835,15.278
  Bottom Layer w0.152: U6.4@-4.422,15.583 -2.53,15.583 v1(-2.37,15.743) ; U6.4@-4.197,15.583 -3.64,15.583 ; -3.247,15.583 ccw(c-3.247,16.62) v1@-2.514,15.886 ; -2.879,15.583 ccw(c-2.879,16.252) v1@-2.406,15.779 ; v1@-2.497,15.902 -2.706,15.606 ; v1@-2.443,15.932 -2.979,15.618 ; v1@-2.362,15.54 -2.979,15.618 ; v1@-2.349,15.541 -2.706,15.606 ; -2.979,15.618 v1(-2.37,15.743) ; -2.706,15.606 v1(-2.37,15.743)
NetJ7_6: J7.6 TP9.1 U6.5 | length 63.7
  Top Layer w0.203: J7.6@-31.28,9.125 -31.28,8.43 ; J7.6@-31.28,9.525 J7.6@-31.28,9.325 -31.28,8.43 ; v1@-30.394,7.366 ccw(c-30.824,7.366) -30.52,7.67 ccw(c-30.217,7.973) v1@-30.217,7.544 ; v1@-30.325,7.225 -29.74,6.889 ; v1@-30.217,7.188 cw(c-30.217,6.759) -29.913,7.062 cw(c-29.609,7.366) v1@-30.039,7.366 ; TP9.1@-30.127,4.838 -29.773,5.457 ; TP9.1@-30.117,4.873 -29.707,5.457 ; v1@-30.075,7.474 -29.74,6.889 ; TP9.1@-30.022,5.026 ccw(c-30.702,5.706) -29.74,5.706 ccw(c-28.778,5.706) TP9.1@-29.458,5.026 ; TP9.1@-29.934,4.762 -29.773,5.457 ; TP9.1@-29.932,4.78 -29.707,5.457 ; TP9.1@-29.548,4.78 -29.773,5.457 ; TP9.1@-29.546,4.762 -29.707,5.457 ; TP9.1@-29.363,4.873 -29.773,5.457 ; TP9.1@-29.353,4.838 -29.707,5.457 ; -31.28,8.43 v1(-30.217,7.366) -29.74,6.889 ; -29.773,5.457 TP9.1@-29.74,4.744 ; TP9.1@-29.74,4.744 -29.707,5.457 ; TP9.1@-29.74,4.744 -29.74,6.889
  Power w0.203: v1@-30.393,7.384 -30.217,8.255 v1@-30.04,7.384 ; v1@-30.389,7.408 -30.231,7.684 ; v1@-30.385,7.423 -30.202,7.684 ; v1@-30.342,7.492 ccw(c-30.646,7.795) -30.217,7.795 ccw(c-29.787,7.795) v1@-30.091,7.492 ; v1@-30.048,7.423 -30.231,7.684 ; v1@-30.044,7.408 -30.202,7.684 ; v1@-1.786,15.362 cw(c-2.215,15.362) -1.912,15.058 cw(c-1.608,14.755) v1@-1.608,15.184 ; v1@-1.744,15.476 -2.319,14.651 ; v1@-1.494,15.225 -2.319,14.651 ; -30.231,7.684 v1(-30.217,7.366) ; v1(-30.217,7.366) -30.202,7.684 ; v1(-30.217,7.366) -30.217,8.518 -29.445,9.29 -25.311,9.29 -24.454,8.433 -9.636,8.433 -8.484,9.585 -8.484,9.588 -7.943,10.129 -4.442,10.129 -2.377,12.194 -2.377,14.593 v1(-1.608,15.362) -2.319,14.651
  Bottom Layer w0.152: U6.5@-4.422,15.183 -1.787,15.183 v1(-1.608,15.362) ; U6.5@-4.197,15.183 -3.64,15.183
NetJ7_7: J7.7 TP10.1 U6.6 | length 68.9
  Top Layer w0.203: J7.7@-30.78,9.125 -30.78,8.504 ; J7.7@-30.78,9.525 J7.7@-30.78,9.325 -30.78,8.504 ; -29.962,8.128 cw(c-29.962,7.447) v1@-29.445,7.891 ; v1@-29.64,7.898 ccw(c-29.912,7.934) -29.718,8.128 ; v1@-29.631,7.814 -29.21,6.907 ; v1@-29.627,7.803 -29.254,7.167 ; v1@-29.599,7.758 ccw(c-30.404,7.067) -30.404,8.128 ; v1@-29.59,7.748 cw(c-30.506,6.832) -29.21,6.832 ; v1@-29.588,7.746 -29.237,7.531 ; v1@-29.543,7.715 -30.052,8.068 ; v1@-29.526,7.707 -30.404,8.128 ; v1@-29.488,8.05 cw(c-29.524,8.322) -29.718,8.128 ; v1@-29.446,7.892 cw(c-30.016,7.322) -29.21,7.322 ; v1@-29.44,7.698 cw(c-29.404,7.426) -29.21,7.62 ; v1@-29.298,7.938 -29.237,7.531 ; v1@-29.288,7.85 ccw(c-29.016,7.814) -29.21,7.62 ; TP10.1@-28.102,4.577 ccw(c-28.363,4.457) -28.363,4.744 ; TP10.1@-28.102,4.911 cw(c-28.363,5.031) -28.363,4.744 ; TP10.1@-27.74,4.744 -28.363,4.744 ; -30.78,8.504 -30.404,8.128 ; -30.404,8.128 -29.433,8.049 -30.052,8.068 ; -30.404,8.128 v1(-29.464,7.874) ; -30.404,8.128 -29.718,8.128 ; -30.052,8.068 v1(-29.464,7.874) ; -29.718,8.128 v1(-29.464,7.874) ; v1(-29.464,7.874) -29.21,6.907 ; v1(-29.464,7.874) -29.254,7.167 ; v1(-29.464,7.874) -29.237,7.531 ; v1(-29.464,7.874) -29.21,7.62 ; -29.254,7.167 -29.289,7.904 -29.21,6.907 ; -29.21,7.62 -29.21,5.591 -28.363,4.744
  Power w0.203: v1@-29.64,7.899 -29.464,8.509 ; v1@-29.637,7.916 -29.479,8.192 ; v1@-29.632,7.931 -29.449,8.192 ; v1@-29.59,8 ccw(c-29.893,8.303) -29.464,8.303 ccw(c-29.035,8.303) v1@-29.338,8 ; v1@-29.296,7.931 -29.479,8.192 ; v1@-29.291,7.916 -29.449,8.192 ; v1@-29.288,7.899 -29.464,8.509 ; v1@-1.024,14.981 cw(c-1.453,14.981) -1.15,14.677 cw(c-0.846,14.374) v1@-0.846,14.803 ; v1@-0.982,15.095 -1.557,14.27 ; v1@-0.732,14.844 -1.557,14.27 ; -29.479,8.192 v1(-29.464,7.874) ; v1(-29.464,7.874) -29.449,8.192 ; v1(-29.464,7.874) -29.464,8.509 ; -29.464,8.509 -29.089,8.884 -25.479,8.884 -24.622,8.026 -9.467,8.026 -8.077,9.416 -8.077,9.419 -7.774,9.722 -4.273,9.722 -1.97,12.025 -1.97,13.857 v1(-0.846,14.981) -1.557,14.27
  Bottom Layer w0.152: U6.6@-4.422,14.783 -1.044,14.783 v1(-0.846,14.981) ; U6.6@-4.197,14.783 -3.64,14.783
NetJ7_8: J7.8 TP11.1 U6.48 | length 63.9
  Top Layer w0.203: J7.8@-30.28,9.325 -30.28,10.36 -29.464,11.176 ; J7.8@-30.28,9.525 -30.28,10.284 ; TP11.1@-29.608,12.213 -29.464,11.176 ; TP11.1@-29.605,12.143 -29.334,11.573 ; -29.464,11.145 cw(c-28.696,11.145) TP11.1@-29.034,11.834 ; -29.464,11.471 cw(c-28.856,11.471) TP11.1@-29.124,12.017 ; TP11.1@-29.405,12.2 -29.334,11.573 ; TP11.1@-29.403,12.221 -29.464,11.176 ; v1@-29.082,11.05 ccw(c-29.385,10.747) -29.385,11.176 ccw(c-29.385,11.605) v1@-29.082,11.302 ; TP11.1@-29.027,12.125 -29.334,11.573 ; TP11.1@-29.026,12.127 -29.464,11.176 ; v1@-29.013,11.008 -29.274,11.191 ; v1@-29.013,11.344 -29.274,11.161 ; v1@-28.998,11.003 -29.274,11.161 ; v1@-28.998,11.349 -29.274,11.191 ; v1@-28.987,11.001 -29.464,11.176 ; v1@-28.987,11.351 -29.464,11.176 ; TP11.1@-28.864,11.995 -29.334,11.573 ; TP11.1@-28.849,12.024 -29.464,11.176 ; -29.464,11.176 TP11.1@-29.21,12.192 ; -29.464,11.176 -29.464,11.938 TP11.1@-29.21,12.192 ; -29.464,11.176 v1(-28.956,11.176) ; -29.334,11.573 TP11.1@-29.21,12.192 ; -29.274,11.161 v1(-28.956,11.176) ; -29.274,11.191 v1(-28.956,11.176)
  Power w0.203: v1@-29.069,11.039 -28.29,10.51 ; v1@-28.956,10.998 cw(c-28.956,10.569) -28.652,10.872 cw(c-28.349,11.176) v1@-28.778,11.176 ; v1(-28.956,11.176) -28.29,10.51 ; v1@-28.819,11.289 -28.29,10.51 ; v1@-3.849,17.394 -3.672,16.523 v1@-3.495,17.394 ; v1@-3.845,17.37 -3.687,17.094 ; v1@-3.84,17.354 -3.657,17.094 ; v1@-3.798,17.286 cw(c-4.101,16.982) -3.672,16.982 cw(c-3.243,16.982) v1@-3.546,17.286 ; v1@-3.504,17.354 -3.687,17.094 ; v1@-3.499,17.37 -3.657,17.094 ; -28.29,10.51 -24.778,10.51 -23.92,9.652 -10.141,9.652 -9.703,10.09 -9.703,10.093 -8.448,11.348 -5.007,11.348 -3.672,12.683 v1(-3.672,17.412) ; -3.687,17.094 v1(-3.672,17.412) ; v1(-3.672,17.412) -3.657,17.094
  Bottom Layer w0.152: U6.48@-5.23,17.816 cw(c-4.9,17.486) -4.9,17.953 ; -5.021,17.937 U6.48@-5.247,17.833 ; -4.463,17.953 U6.48@-5.247,17.608 -5.247,17.843 -5.138,17.953 ; v1@-3.875,17.412 ccw(c-4.366,17.412) -4.019,17.759 ccw(c-3.672,18.105) v1@-3.672,17.615 ; v1@-3.834,17.288 -4.213,17.953 ; v1@-3.549,17.573 -4.213,17.953 ; U6.48@-5.247,17.833 -5.138,17.953 ; U6.48@-5.247,17.833 -5.138,17.953 ; -5.138,17.953 -4.213,17.953 ; -4.213,17.953 v1(-3.672,17.412) -4.213,17.953
NetL1_1: L1.1 U2.2 | length 13.1
  Bottom Layer w0.254: L1.1@-47.298,4.855 -47.04,4.597 U2.2@-44.971,4.597 ; L1.1@-46.752,4.587 -46.269,4.628 ; L1.1@-46.726,4.583 -45.522,4.597 ; L1.1@-46.719,4.583 -45.815,4.649 ; L1.1@-46.685,4.868 ccw(c-46.029,5.523) -46.029,4.597 ; L1.1@-46.61,5.113 -45.522,4.597 ; L1.1@-46.597,5.108 -45.815,4.649 ; L1.1@-46.508,5.051 -46.269,4.628 ; L1.1@-46.505,5.048 ccw(c-45.416,6.137) -45.416,4.597 ; -46.008,4.597 U2.2@-45.096,4.597 ; L1.1@-46.698,4.855 -46.269,4.628 ; L1.1@-46.698,4.855 -45.815,4.649 ; L1.1@-46.698,4.855 -45.522,4.597
NetL8_1: L8.1 Q1.4 Q2.3 | length 20.9
  Bottom Layer w0.508: Q2.3@-9.135,2.938 ccw(c-9.482,3.285) -8.992,3.285 ccw(c-8.501,3.285) Q2.3@-8.848,2.938 ; Q2.3@-8.492,2.938 ccw(c-7.552,3.878) -7.552,2.548 ; Q2.3@-8.217,2.726 -7.493,2.598 Q2.3@-8.636,2.794 ; Q1.4@-8.066,5.079 -8.992,4.153 -8.992,2.972 Q2.3@-8.814,2.794 -8.568,2.548 -7.493,2.548 ; -7.896,2.593 Q2.3@-8.636,2.794 ; -7.493,2.502 cw(c-7.493,1.184) L8.1@-6.561,2.116 ; -6.834,2.325 -7.493,2.498 ; L8.1@-6.546,1.905 ccw(c-7.019,1.905) -6.685,2.24 ccw(c-6.35,2.574) L8.1@-6.35,2.101 ; L8.1@-6.223,1.778 L8.1@-6.35,1.905 ; Q2.3@-8.636,2.794 -7.493,2.548 ; -7.493,2.498 L8.1@-6.35,1.905 ; -7.493,2.498 L8.1@-6.35,1.905 ; -7.493,2.498 L8.1@-6.35,1.905 ; -7.493,2.498 -7.152,2.457 L8.1@-6.35,1.905 ; -7.493,2.548 -6.993,2.548 ; -7.493,2.548 -6.993,2.548 ; -7.493,2.548 -6.993,2.548 ; -6.993,2.548 L8.1@-6.35,1.905 ; -6.993,2.548 L8.1@-6.35,1.905
NetQ2_2: Q2.2 R15.1 R16.2 | length 12.3
  Bottom Layer w0.508: -11.821,2.144 -12.319,2.228 Q2.2@-11.227,1.778 ; -11.74,2.092 Q2.2@-11.227,1.778 ; -11.53,2.278 cw(c-11.53,1.64) Q2.2@-10.949,1.904 ; Q2.2@-11.412,1.694 ccw(c-12.319,1.281) R16.2@-12.319,2.278 ; Q2.2@-11.392,1.897 ccw(c-11.63,2.07) -11.422,2.278 ; Q2.2@-11.049,1.778 -11.049,1.905 -11.422,2.278 ; R16.2@-12.319,2.278 Q2.2@-11.227,1.778 ; R16.2@-12.319,2.278 -11.422,2.278 ; -11.422,2.278 Q2.2@-11.227,1.778 ; -11.422,2.278 Q2.2@-11.227,1.778 ; R16.2@-12.319,2.328 R15.1@-12.319,3.437 -12.319,2.532 -12.319,3.387 R16.2@-12.319,2.328
NetQ3_2: Q3.2 R14.1 R25.2 | length 26.5
  Bottom Layer w0.508: R14.1@-16.638,4.534 cw(c-16.45,3.743) Q3.2@-15.875,4.318 ; -16.293,4.534 Q3.2@-15.563,4.336 ; -16.239,4.528 Q3.2@-15.563,4.336 ; -16.154,4.479 ccw(c-15.935,4.858) Q3.2@-15.681,4.501 ; Q3.2@-15.982,4.405 R14.1@-16.637,4.53 ; Q3.2@-15.707,4.193 ccw(c-16.637,3.271) R14.1@-16.637,4.58 ; Q3.2@-15.662,4.513 cw(c-15.855,4.862) -16.137,4.58 ; Q3.2@-15.494,3.937 Q3.2@-15.875,4.318 ; R14.1@-16.637,4.53 Q3.2@-15.875,4.318 ; R14.1@-16.637,4.53 -16.217,4.522 Q3.2@-15.563,4.336 ; R14.1@-16.637,4.53 Q3.2@-15.563,4.336 ; R14.1@-16.637,4.53 Q3.2@-15.563,4.336 ; R14.1@-16.637,4.53 Q3.2@-15.563,4.336 ; R14.1@-16.637,4.58 -16.137,4.58 ; R14.1@-16.637,4.58 Q3.2@-16.01,4.58 ; R14.1@-16.637,4.58 -16.137,4.58 ; R14.1@-16.637,4.58 -16.137,4.58 ; R14.1@-16.637,4.58 Q3.2@-15.563,4.336 ; R14.1@-16.637,4.58 Q3.2@-15.563,4.336 ; R14.1@-16.637,4.58 Q3.2@-15.563,4.336 ; R14.1@-16.637,4.58 Q3.2@-15.563,4.336 ; R14.1@-16.637,4.58 Q3.2@-15.563,4.336 ; R14.1@-16.637,4.58 R25.2@-17.653,4.58 R14.1@-16.637,4.58 ; R14.1@-16.637,4.58 -16.137,4.58 ; -16.137,4.58 cw(c-16.137,4.191) -15.76,4.286 ccw(c-16.137,4.191) -16.137,4.58 ; -16.137,4.58 Q3.2@-15.563,4.336 ; -16.137,4.58 Q3.2@-15.563,4.336 ; -16.137,4.58 Q3.2@-15.563,4.336 ; -16.137,4.58 Q3.2@-15.563,4.336 ; -16.137,4.58 Q3.2@-15.563,4.336 ; -16.137,4.58 Q3.2@-15.563,4.336 ; -16.137,4.58 Q3.2@-15.875,4.318 ; -16.137,4.58 Q3.2@-16.01,4.58 ; Q3.2@-16.01,4.58 -15.875,4.445 Q3.2@-15.875,4.318
NetQ5_2: Q5.2 R44.1 | length 3.4
  Bottom Layer w0.508: -66.321,5.609 cw(c-66.321,5.091) Q5.2@-65.955,5.457 ; -66.282,5.609 ccw(c-66.282,6.072) Q5.2@-65.955,5.744 ; Q5.2@-65.811,5.601 R44.1@-67.056,5.609 Q5.2@-65.641,5.609
NetQ5_3: Q5.3 R42.2 | length 10.2
  Bottom Layer w0.508: Q5.3@-63.436,6.832 cw(c-62.979,6.375) Q5.3@-62.979,7.022 ; Q5.3@-63.398,6.617 Q5.3@-62.993,7.022 ; Q5.3@-63.077,6.473 cw(c-61.752,5.148) -61.752,7.022 ; -62.237,6.958 Q5.3@-63.22,6.617 ; Q5.3@-63.22,6.617 R42.2@-61.468,7.022 ; Q5.3@-63.22,6.617 R42.2@-61.468,7.022 ; Q5.3@-62.993,7.022 R42.2@-61.468,7.022 ; Q5.3@-62.993,7.022 R42.2@-61.468,7.022
NetQ6_1: Q6.1 R45.2 R65.1 | length 12.2
  Bottom Layer w0.508: R45.2@-67.058,3.154 cw(c-66.86,2.835) -66.594,3.101 ; R45.2@-67.056,3.055 cw(c-67.056,1.829) -66.189,2.696 ; -66.443,2.89 R45.2@-67.056,3.051 ; -66.284,2.791 cw(c-66.934,2.14) Q6.1@-66.015,2.14 ; -66.138,2.6 Q6.1@-65.811,2.14 ; R45.2@-67.056,3.051 Q6.1@-65.634,2.14 -66.594,3.101 ; R45.2@-67.056,3.051 Q6.1@-65.811,2.14 ; -66.594,3.101 R45.2@-67.056,3.101 R65.1@-68.072,3.101 -66.594,3.101 ; -66.594,3.101 Q6.1@-65.811,2.14
NetQ6_3: Q6.3 R36.2 | length 19.6
  Bottom Layer w0.508: Q6.3@-63.321,3.156 cw(c-63.321,0.732) R36.2@-61.607,2.446 ; Q6.3@-63.077,3.013 cw(c-62.73,2.666) -62.73,3.156 cw(c-62.73,3.647) Q6.3@-63.077,3.3 ; -62.693,3.074 R36.2@-61.468,2.585 ; -62.094,3.156 cw(c-62.094,1.958) R36.2@-61.247,2.805 ; -61.784,3.115 R36.2@-61.468,2.585 ; R36.2@-61.664,2.585 ccw(c-62.137,2.585) -61.803,2.919 ccw(c-61.468,3.254) R36.2@-61.468,2.781 ; Q6.3@-63.221,3.156 -62.039,3.156 ; Q6.3@-63.221,3.156 -62.109,2.831 R36.2@-61.468,2.585 ; Q6.3@-63.221,3.156 R36.2@-61.468,2.585 ; Q6.3@-63.221,3.156 R36.2@-61.468,2.585 ; -62.039,3.156 R36.2@-61.468,2.585 ; -62.039,3.156 R36.2@-61.468,2.585 ; -62.039,3.156 R36.2@-61.468,2.585 ; -62.039,3.156 R36.2@-61.468,2.585 ; -62.039,3.156 Q6.3@-63.398,3.156 R36.2@-61.468,2.585
NetQ7_3: Q7.3 R62.2 R64.2 | length 8.9
  Bottom Layer w0.762: Q7.3@-51.791,2.689 cw(c-51.354,2.253) -51.354,2.87 ; Q7.3@-52.022,2.87 -50.388,2.807 -51.845,2.743 -50.402,2.87 Q7.3@-52.022,2.87 ; R64.2@-50.338,1.664 R62.2@-50.338,2.807 R64.2@-50.338,1.664
NetQ9_3: Q9.3 R57.1 R68.2 | length 9.5
  Bottom Layer w0.508: R68.2@-26.924,18.076 -26.924,19.85 ; Q9.3@-26.069,20.596 -26.485,20.596 ; Q9.3@-26.065,20.633 ccw(c-26.253,20.364) -26.485,20.596 ; R68.2@-26.924,18.026 R57.1@-25.908,18.026 ; R68.2@-26.924,18.026 R57.1@-25.908,18.026 ; R68.2@-26.924,18.026 R57.1@-25.908,18.026 ; R68.2@-26.924,18.026 R57.1@-25.908,18.026 ; R68.2@-26.924,18.026 -26.924,20.158 -26.485,20.596
NetQ10_1: Q10.1 R69.2 | length 2.3
  Top Layer w0.914: Q10.1@-37.592,4.013 -37.592,2.929 Q10.1@-37.592,4.191
NetQ10_2: Q10.2 TP74.1 U6.25 | length 91.9
  Top Layer w0.152: TP74.1@-41.144,2.77 -40.39,2.854 ; TP74.1@-41.144,3.008 -40.39,2.924 ; TP74.1@-41.141,2.77 -40.191,2.889 ; TP74.1@-41.141,3.008 -40.191,2.889 ; TP74.1@-41.133,2.771 -40.39,2.924 ; TP74.1@-41.133,3.007 -40.39,2.854 ; TP74.1@-41.112,2.62 -40.39,2.854 ; TP74.1@-41.112,3.158 -40.39,2.924 ; TP74.1@-41.11,2.62 -40.191,2.889 ; TP74.1@-41.11,3.158 -40.191,2.889 ; TP74.1@-41.087,2.624 -40.39,2.924 ; TP74.1@-41.087,3.154 -40.39,2.854 ; TP74.1@-41.054,2.476 -40.191,2.889 ; TP74.1@-41.054,3.302 -40.191,2.889 ; TP74.1@-41.049,2.477 -40.39,2.854 ; TP74.1@-41.049,3.301 -40.39,2.924 ; TP74.1@-41.011,2.488 -40.39,2.924 ; TP74.1@-41.011,3.29 -40.39,2.854 ; TP74.1@-40.956,2.697 cw(c-40.493,2.234) -40.493,2.889 cw(c-40.493,3.544) TP74.1@-40.956,3.081 ; TP74.1@-40.848,2.589 cw(c-40.125,1.866) -40.125,2.889 cw(c-40.125,3.912) TP74.1@-40.848,3.189 ; Q10.2@-39.864,3.911 -39.497,3.302 ; Q10.2@-39.862,3.904 -39.546,3.512 ; Q10.2@-39.857,4.493 -39.497,4.953 ; Q10.2@-39.834,3.835 -39.448,3.512 ; Q10.2@-39.724,3.983 -39.546,3.512 ; Q10.2@-39.723,3.976 -39.497,3.302 ; Q10.2@-39.721,4.414 -39.497,4.953 ; Q10.2@-39.713,3.94 -39.448,3.512 ; Q10.2@-39.708,3.696 cw(c-39.97,3.302) -39.497,3.302 ; Q10.2@-39.651,4.717 ccw(c-39.754,4.953) -39.497,4.953 ; Q10.2@-39.497,4.369 -39.497,4.953 ; Q10.2@-39.343,4.717 cw(c-39.24,4.953) -39.497,4.953 ; Q10.2@-39.286,3.696 ccw(c-39.024,3.302) -39.497,3.302 ; Q10.2@-39.281,3.94 -39.546,3.512 ; Q10.2@-39.273,4.414 -39.497,4.953 ; Q10.2@-39.271,3.976 -39.497,3.302 ; Q10.2@-39.27,3.983 -39.448,3.512 ; Q10.2@-39.16,3.835 -39.546,3.512 ; Q10.2@-39.137,4.493 -39.497,4.953 ; Q10.2@-39.132,3.904 -39.448,3.512 ; Q10.2@-39.13,3.911 -39.497,3.302 ; -36.279,10.302 cw(c-35.067,10.302) v1@-35.924,11.159 ; -36.279,10.67 cw(c-35.435,10.67) -36.032,11.267 v1@-36.195,11.104 ; -36.279,11.038 cw(c-35.803,11.038) v1@-36.14,11.375 ; v1@-36.27,11.323 -36.238,10.616 ; v1@-36.269,11.33 -36.279,10.504 ; v1@-36.268,11.341 -36.251,10.889 ; v1@-36.249,11.211 cw(c-36.396,11.136) -36.279,11.02 ; v1@-36.075,11.1 ccw(c-36.085,10.826) -36.279,11.02 ; v1@-35.905,11.181 -36.251,10.889 ; TP74.1@-41.148,2.889 -40.39,2.854 ; TP74.1@-41.148,2.889 -40.39,2.924 ; TP74.1@-41.148,2.889 -39.91,2.889 -39.497,3.302 ; -39.546,3.512 Q10.2@-39.497,4.013 ; -39.497,3.302 Q10.2@-39.497,4.013 ; -39.497,3.302 Q10.2@-39.497,4.191 -39.497,4.953 ; Q10.2@-39.497,4.013 -39.448,3.512 ; -39.497,4.953 -39.243,5.207 -38.1,5.207 -36.279,7.028 -36.279,11.02 ; -36.279,10.504 -35.879,11.227 -36.238,10.616 ; -36.279,10.504 v1(-36.068,11.303) ; -36.279,11.02 -35.947,11.14 -36.279,11.02 ; -36.279,11.02 -36.259,11.373 -36.279,11.02 ; -36.279,11.02 v1(-36.068,11.303) ; -36.279,11.02 v1(-36.068,11.303) ; -36.279,11.02 v1@-36.195,11.104 ; -36.251,10.889 v1(-36.068,11.303) ; -36.238,10.616 v1(-36.068,11.303) ; v1@-36.195,11.104 -36.195,11.176 v1(-36.068,11.303)
  Power w0.152: v1@-36.269,11.27 -36.068,10.668 ; v1@-36.266,11.255 -36.085,10.939 ; v1@-36.26,11.237 -36.051,10.939 ; v1@-36.212,11.159 cw(c-36.559,10.812) -36.068,10.812 cw(c-35.577,10.812) v1@-35.924,11.159 ; v1@-35.876,11.237 -36.085,10.939 ; v1@-35.87,11.255 -36.051,10.939 ; v1@-35.867,11.27 -36.068,10.668 ; v1(-10.668,11.811) -10.846,11.633 -10.846,10.363 -11.176,10.033 -16.609,10.033 -17.561,10.986 -24.403,10.986 -26.904,13.487 -31.372,13.487 -32.055,12.804 -32.055,11.76 -33.528,10.287 -35.687,10.287 -36.068,10.668 ; -36.085,10.939 v1(-36.068,11.303) ; -36.068,10.668 v1(-36.068,11.303) ; -36.068,10.668 v1(-36.068,11.303) ; v1(-36.068,11.303) -36.051,10.939
  Bottom Layer w0.152: U6.25@-10.697,12.383 -10.884,12.383 ; v1(-10.668,11.811) -10.947,12.09 -10.947,12.319 -10.884,12.383 ; U6.25@-10.472,12.383 -10.884,12.383
NetQ10_3: Q10.3 Q12.1 R74.2 | length 12.8
  Top Layer w0.508: Q12.1@-38.481,8.039 Q12.1@-38.506,8.064 ; Q12.1@-38.185,7.921 cw(c-37.838,7.574) -37.838,8.064 cw(c-37.838,8.555) Q12.1@-38.185,8.208 ; Q12.1@-38.506,8.064 R74.2@-36.957,8.136 ; Q12.1@-38.506,8.064 R74.2@-37.028,8.064 ; R74.2@-37.028,8.064 -38.329,8.064 R74.2@-36.957,8.136 ; R74.2@-37.028,8.064 R74.2@-36.957,8.136
  Top Layer w0.914: Q12.1@-38.506,8.064 Q10.3@-38.481,6.426 -38.481,8.039 -38.481,6.604 Q12.1@-38.506,8.064
NetQ11_2: Q11.2 R34.1 R60.2 | length 8.2
  Bottom Layer w0.508: Q11.2@-28.011,19.249 cw(c-28.358,18.902) -27.867,18.902 cw(c-27.376,18.902) Q11.2@-27.723,19.249 ; R60.2@-27.94,18.026 R34.1@-28.956,18.026 -28.134,18.026 -28.007,18.153 R60.2@-27.867,18.293 ; R60.2@-27.867,18.293 -27.867,19.393 -27.94,18.076 Q11.2@-27.867,19.571 R60.2@-27.867,18.293
NetR4_2: R4.2 U1.10 | length 6
  Top Layer w0.254: R4.2@-71.606,16.716 ccw(c-71.04,17.282) -71.04,16.482 ; R4.2@-71.563,16.809 -71.236,16.482 ; R4.2@-71.426,16.896 ccw(c-70.427,17.895) -70.427,16.482 ; R4.2@-71.39,16.809 ccw(c-70.972,16.809) -71.268,16.513 ; -71.247,16.509 R4.2@-71.513,16.809 ; -70.792,16.53 R4.2@-71.513,16.809 ; U1.10@-69.82,16.482 -71.236,16.482 ; R4.2@-71.513,16.809 -71.236,16.482 ; R4.2@-71.513,16.809 -71.236,16.482
NetR22_2: R22.2 U3.10 | length 7
  Bottom Layer w0.254: R22.2@-27.24,1.156 -26.942,0.858 ; R22.2@-27.067,1.156 ccw(c-26.649,1.156) -26.945,0.86 ; U3.10@-23.291,1.834 -23.291,1.116 ; U3.10@-23.291,2.109 -23.291,1.116 ; -26.942,0.858 -27.19,1.156 -26.942,0.858 ; -26.942,0.858 -23.549,0.858 -23.291,1.116